# Altium PCB breakout_board.PcbDoc
Units mil, origin at the board's own origin, x right, y up, seen from the top; angles counter-clockwise.
Board outline 2420 x 1070 mil, 4 copper layers (Top Layer, Internal Plane 1, Internal Plane 2, Bottom Layer); 4 components, 24 nets, 54 pads, 0 vias.
Unrouted connection lines stored in the file: 2.
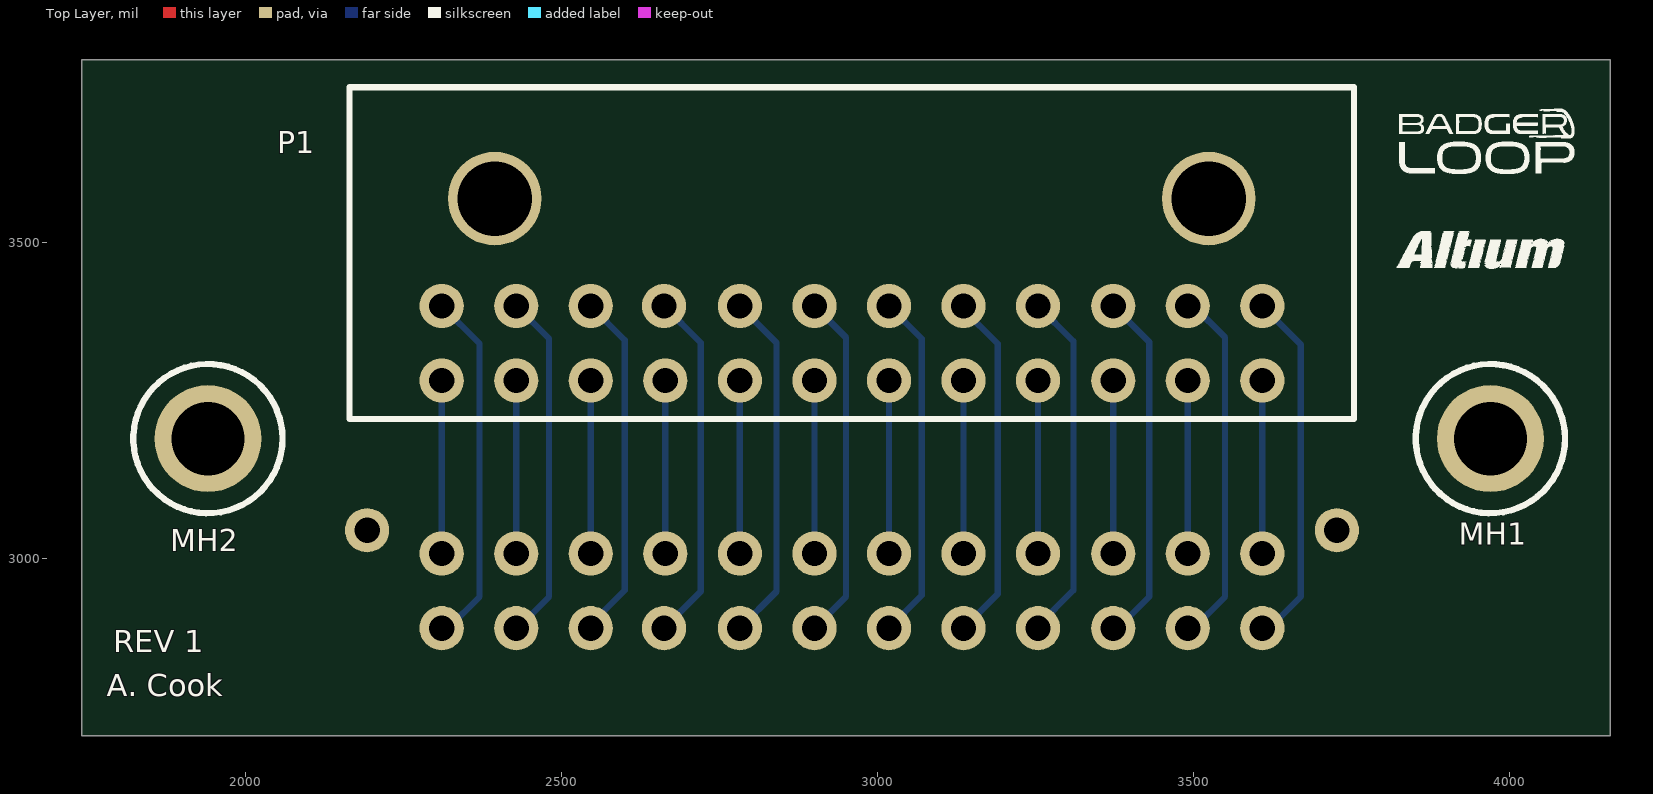
[diagram p0: Top Layer view]
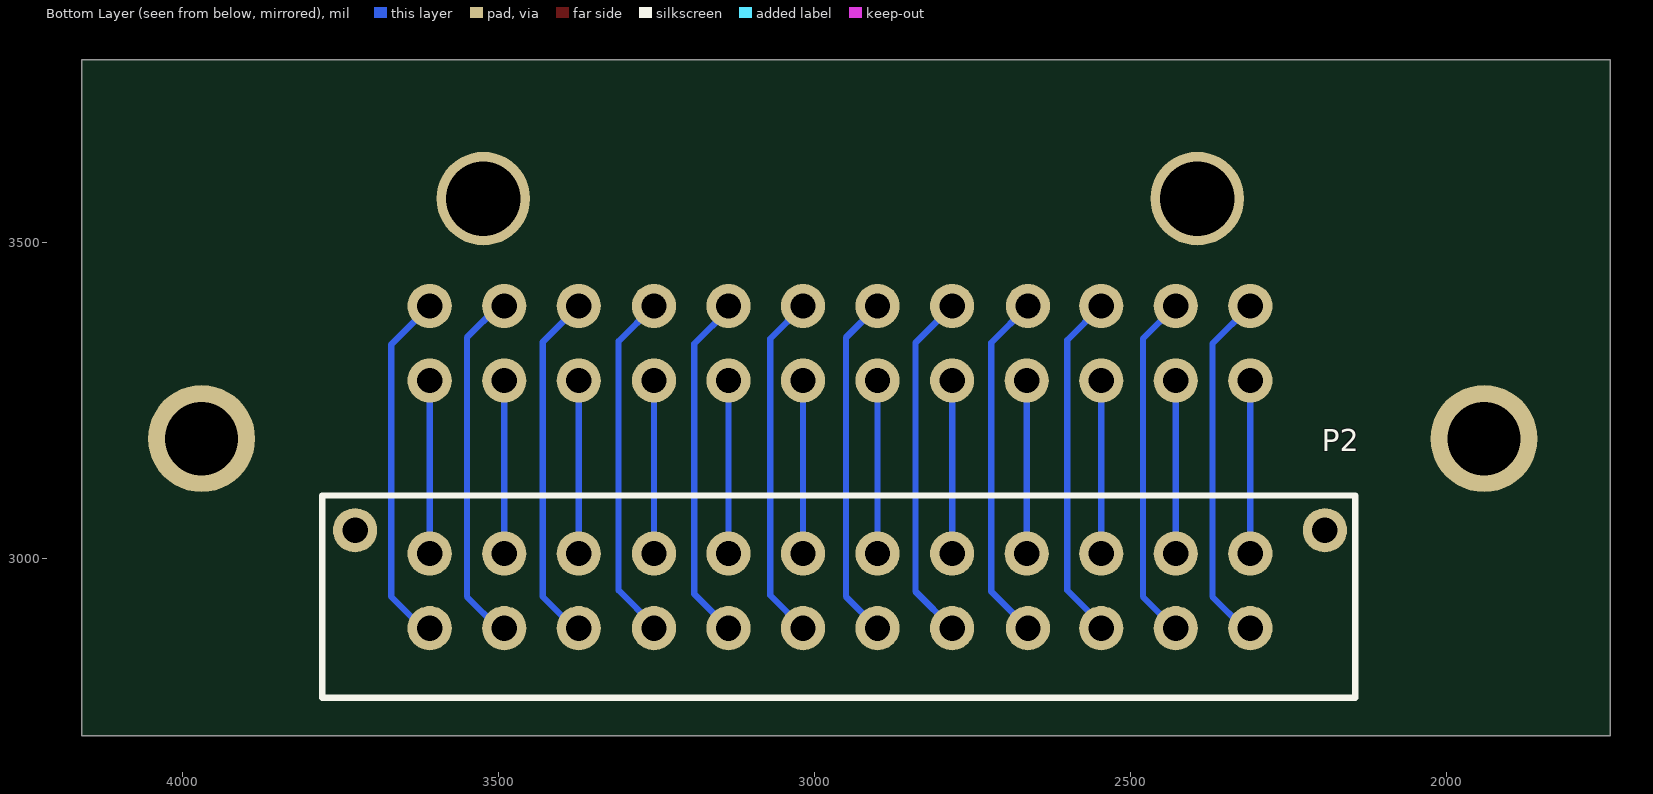
[diagram p1: Bottom Layer view, seen from below]
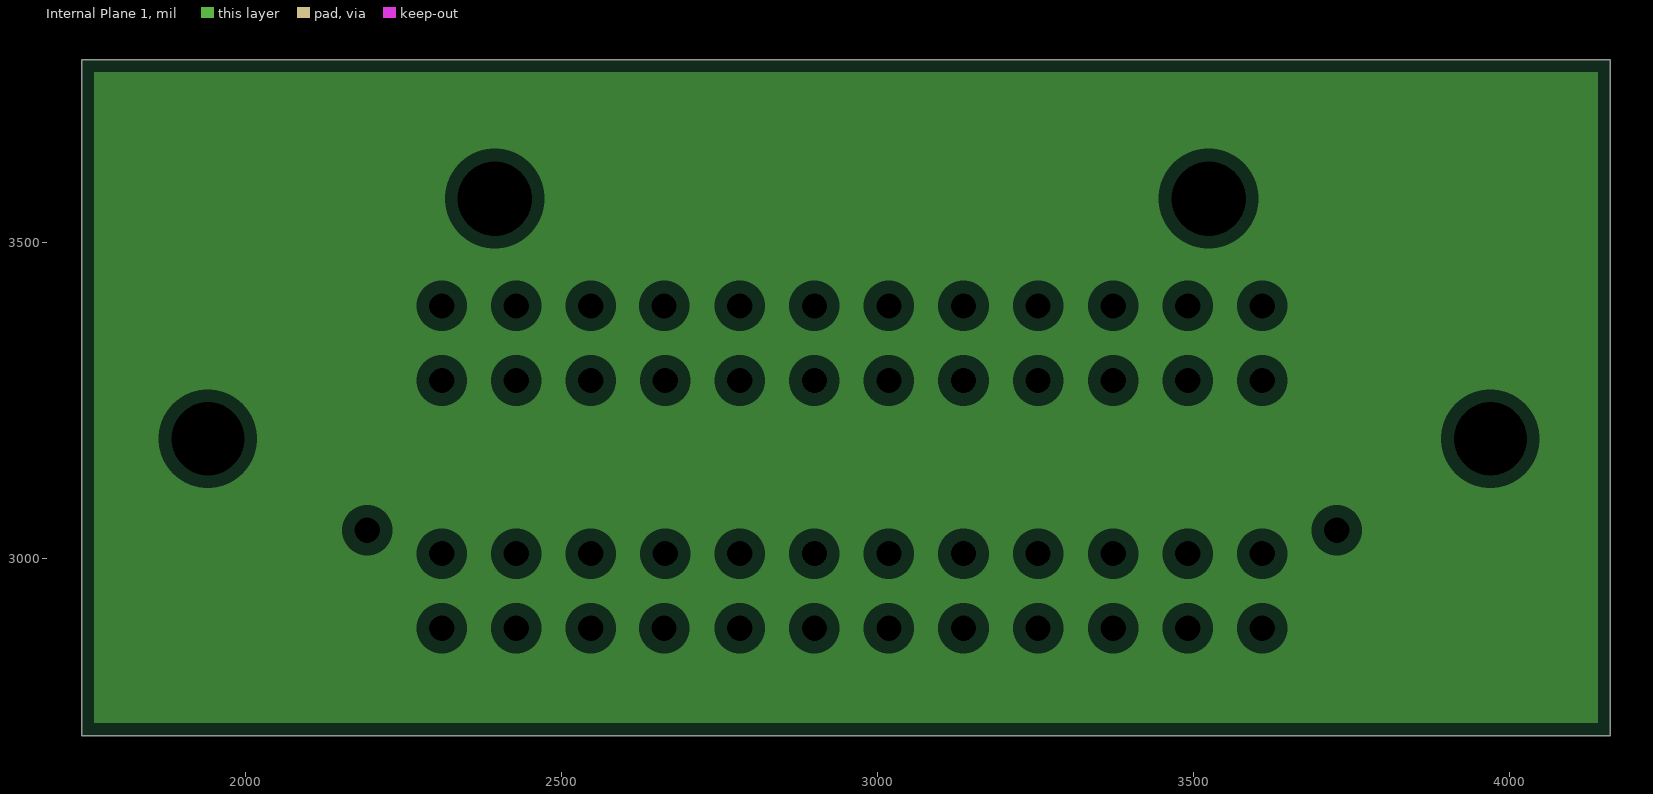
[diagram p2: Internal Plane 1, clearances drawn from the general rule]
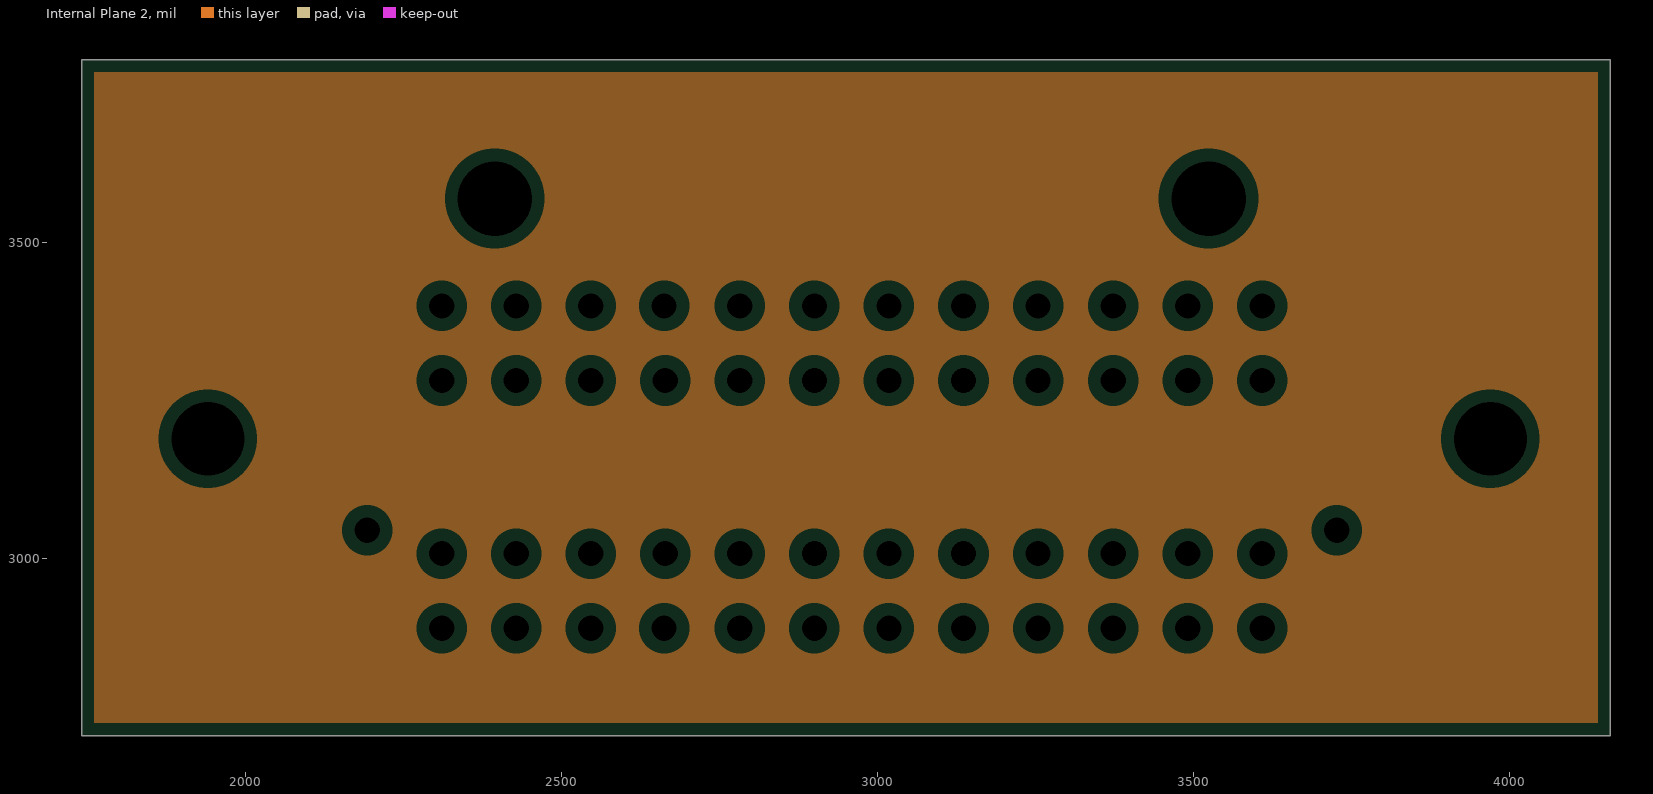
[diagram p3: Internal Plane 2, clearances drawn from the general rule]

## Layer stack, top to bottom
Top Solder: solder mask 0.4, Solder Resist, Dk 3.5
Top Layer: signal copper 1.4
Dielectric 1: dielectric 12.6, FR-4, Dk 4.8
Internal Plane 1: plane copper 1.4
Dielectric2: dielectric 12.6, FR-4, Dk 4.8
Internal Plane 2: plane copper 1.4
Dielectric3: dielectric 12.6, FR-4, Dk 4.8
Bottom Layer: signal copper 1.4
Bottom Solder: solder mask 0.4, Solder Resist, Dk 3.5

## Board outline
1740,2720 1740,3790 4160,3790 4160,2720

## Design rules (kind name [scope] priority, off if disabled: settings)
Clearance [All] p1: gap=10 ignorepadtopadclearanceinfootprint=FALSE except(0: Arc-Hole Track-Hole SMDPad-Hole THPad-Hole Via-Hole Fill-Hole Poly-Hole Region-Hole Text-Hole)
PlaneClearance [All] p1: clearance=20
PlaneConnect [All] p1: planeconnectstyle=Relief reliefexpansion=20 reliefentries=4 reliefconductorwidth=10 reliefairgap=10
PolygonConnect [All] p1: connectstyle=Relief reliefconductorwidth=10 reliefentries=4 polygonreliefangle="90 Angle" airgapwidth=10
RoutingVias [All] p1: holewidth=28 width=50 viastyle="Through Hole" minholewidth=28 minwidth=50 maxholewidth=28 maxwidth=50
SolderMaskExpansion [All] p1: expansion=4
Width [All] p1: maxlimit=10 minlimit=10 preferedwidth=10
28 further rules are at their usual default settings.

## Classes and differential pairs
component class connectors: MH1 MH2

## Components (designator, comment, footprint, x,y, rotation, side; value= is the part's Value field where it differs from the comment)
MH1 "4-40 Mount Hole" MH 3970,3190 r0 top
MH2 "4-40 Mount Hole" MH 1940,3190 r0 top
P1 "43045-2400" 430452400 2394,3570 r180 top
P2 "43045-2412" 0430452412 2394,2720 r180 bottom

## Footprints (in the part's own frame and the unit in brackets; to place one, negate y for a bottom-side part, rotate by r counter-clockwise, add the part's x,y. Pads: shape width x height; smd on the part's side, far side on the other; paste and mask are expansions set on the pad)
430452400 [mil]
  round 70 hole 40: 1(84,170) 2(-34,170) 3(-152,170) 4(-268,170) 5(-388,170) 6(-506,170) 7(-624,170) 8(-742,170) 9(-860,170) 10(-979,170) 11(-1097,170) 12(-1215,170) 13(84,288) 14(-34,288) 15(-152,288) 16(-270,288) 17(-388,288) 18(-506,288) 19(-624,288) 20(-742,288) 21(-860,288) 22(-979,288) 23(-1097,288) 24(-1215,288)
  round 148 hole 118: 21(-1130,0) 21(0,0)
  silkscreen extent -1360,-176 230,349, body extent -1350,-176 231,306, height 340
0430452412 [mil]
  round 70 hole 40: 1(84,170) 2(-34,170) 3(-152,170) 4(-268,170) 5(-388,170) 6(-506,170) 7(-624,170) 8(-742,170) 9(-860,170) 10(-979,170) 11(-1097,170) 12(-1215,170) 13(84,288) 14(-34,288) 15(-152,288) 16(-270,288) 17(-388,288) 18(-506,288) 19(-624,288) 20(-742,288) 21(-860,288) 22(-979,288) 23(-1097,288) 24(-1215,288) ""(-1333,325) ""(202,325)
  silkscreen extent -1385,60 250,380, body extent -1356,-1 225,418, height 405
MH [mm] "#10 Mount Hole"
  round 4.3 hole 2.946 unplated: 2(0,0)
  silkscreen extent -3,-3 3,3, body extent -2.32,-2.58 2.32,2.07, height 2.84

## Part data
P1: "Molex MICRO-FIT 3.0 Series, Series Number 43045, 3mm Pitch 24 Way 2 Row Right Angle PCB Header, Solder Termination, 5A", Color=Black, Contact Resistance=10mR, Current Rating=5A, Flammability Rating="UL94 V-0", Insulation Resistance=1GR, Manufacturer=Molex, Max Operating Temperature=105°C, Max Voltage Rating (DC)=250.25kV, Min Operating Temperature=-40°C, Operating Supply Voltage=250V, Package Quantity=576, Supplier Part Number 1=WM4728-ND, Voltage Rating=600V, Approvals=UL,CSA,TUV, ComponentLink1Description=https://datasheet.ciiva.com/19461/800104-19461233.pdf?src-supplier=Jameco, ComponentLink1URL=https://datasheet.ciiva.com/19461/800104-19461233.pdf?src-supplier=Jameco, ComponentLink2Description=https://datasheet.ciiva.com/36179/144580430452400-pcb-headers-36179650.pdf?src-supplier=Onlinecomponents.com, ComponentLink2URL=https://datasheet.ciiva.com/36179/144580430452400-pcb-headers-36179650.pdf?src-supplier=Onlinecomponents.com, ComponentLink3Description=https://datasheet.ciiva.com/5156/0430452400-pcb-headers-5156852.pdf?src-supplier=Mouser, ComponentLink3URL=https://datasheet.ciiva.com/5156/0430452400-pcb-headers-5156852.pdf?src-supplier=Mouser, ComponentLink4Description=https://datasheet.ciiva.com/11748/0900766b80d6135b-11748645.pdf?src-supplier=RSComponents, ComponentLink4URL=https://datasheet.ciiva.com/11748/0900766b80d6135b-11748645.pdf?src-supplier=RSComponents, ComponentLink5Description=https://datasheet.ciiva.com/7839/1596512-7839674.pdf?src-supplier=Element14, ComponentLink5URL=https://datasheet.ciiva.com/7839/1596512-7839674.pdf?src-supplier=Element14, ComponentLink6Description=https://datasheet.ciiva.com/16657/0430452400-pcb-headers-16657916.pdf?src-supplier=Avnet+Europe, ComponentLink6URL=https://datasheet.ciiva.com/16657/0430452400-pcb-headers-16657916.pdf?src-supplier=Avnet+Europe, ComponentLink7Description=https://datasheet.ciiva.com/14155/04402310-14155214.pdf?src-supplier=Distrelec, ComponentLink7URL=https://datasheet.ciiva.com/14155/04402310-14155214.pdf?src-supplier=Distrelec, Contact Material=Brass,Tin, Contact Plating=Tin, Depth=12.2mm, Gender=Male, Glow Wire Compliant=Compliant, Halogen Free="Low Halogen", Height=8.77mm, Housing Color=Black, Housing Material=Thermoplastic, Lead Free="Lead Free", Lead Pitch=3mm, Length=40.15mm, Manufacturer Part Number=43045-2400, Max Current Rating=5A, Mount="Through Hole", Number of Circuits=24, Number of Contacts=24, Number of Poles=24, Number of Positions=24, Number of Rows=2, Orientation="Right Angle", Packaging=Tray, Pitch=3mm, Pricing 1="1=6.20000, 10=5.95100, 100=4.95920, 576=4.21531, 1152=3.59542 (USD)", Radiation Hardening=No, REACH SVHC=Unknown, RoHS=Yes, Row Spacing=3mm, Stock 1=970, Supplier 1=Digi-Key, Termination=Solder, Voltage Rating (AC)=250V, Voltage Rating (DC)=250V, Working Voltage=250V
P2: "HEADER, VERTICAL, 24WAY; Series:Micro-Fit 3.0; Pitch Spacing:3mm; Contact Termination Type:Through Hole; No. of Contacts:24; No. of Rows:2; Connector Mounting:PCB; Gender:Plug; Contact Material:Brass; Contact Plating:Tin; ;RoHS Compliant: Yes", Color=Black, Contact Resistance=10mR, Current Rating=5A, Flammability Rating="UL94 V-0", Insulation Resistance=1GR, Manufacturer=Molex, Max Operating Temperature=105°C, Max Voltage Rating (DC)=250.25kV, Min Operating Temperature=-40°C, Operating Supply Voltage=250V, Package Quantity=576, Supplier Part Number 1=WM4716-ND, Voltage Rating=600V, Approvals=UL,CSA,TUV, ComponentLink1Description=http://www.farnell.com/datasheets/1786158.pdf?src-supplier=Element14, ComponentLink1URL=http://www.farnell.com/datasheets/1786158.pdf?src-supplier=Element14, ComponentLink2Description=https://www.alliedelec.com/m/d/28e7c516ce872cc01c31d58871c770af.pdf?src-supplier=Allied+Electronics, ComponentLink2URL=https://www.alliedelec.com/m/d/28e7c516ce872cc01c31d58871c770af.pdf?src-supplier=Allied+Electronics, ComponentLink3Description=http://www.jameco.com/Jameco/Products/ProdDS/883907.pdf?src-supplier=Jameco, ComponentLink3URL=http://www.jameco.com/Jameco/Products/ProdDS/883907.pdf?src-supplier=Jameco, ComponentLink4Description=http://www.mouser.com/ds/2/276/0430452412_PCB_HEADERS-168381.pdf?src-supplier=Mouser, ComponentLink4URL=http://www.mouser.com/ds/2/276/0430452412_PCB_HEADERS-168381.pdf?src-supplier=Mouser, ComponentLink5Description=http://www.molex.com/webdocs/datasheets/pdf/en-us/0430452412_PCB_HEADERS.pdf?src-supplier=Avnet, ComponentLink5URL=http://www.molex.com/webdocs/datasheets/pdf/en-us/0430452412_PCB_HEADERS.pdf?src-supplier=Avnet, ComponentLink6Description=http://uk.rs-online.com/webdocs/13c3/0900766b813c3b1e.pdf?src-supplier=RSComponents, ComponentLink6URL=http://uk.rs-online.com/webdocs/13c3/0900766b813c3b1e.pdf?src-supplier=RSComponents, ComponentLink7Description=http://www.molex.com/webdocs/datasheets/pdf/en-us/0430452412_PCB_HEADERS.pdf?src-supplier=Avnet+Europe, ComponentLink7URL=http://www.molex.com/webdocs/datasheets/pdf/en-us/0430452412_PCB_HEADERS.pdf?src-supplier=Avnet+Europe, Connector Type=Plug,Socket, Contact Material=Brass,Tin, Contact Plating=Tin, Depth=8.77mm, Gender=Male, Glow Wire Compliant=Compliant, Halogen Free="Low Halogen", Height=9.91mm, Housing Color=Black, Housing Material=Thermoplastic, Lead Free="Lead Free", Lead Pitch=3mm, Length=40.15mm, Material=Polyester, Max Current Rating=5A, Mount="Through Hole", Number of Circuits=24, Number of Contacts=24, Number of Poles=24, Number of Positions=24, Number of Rows=2, Orientation=Vertical, Packaging=Tray, Pitch=3mm, Pricing 1="1=4.89, 10=4.693, 100=3.9112, 576=3.32451, 1152=2.83562 (USD)", Radiation Hardening=No, REACH SVHC=Unknown, Row Spacing=3mm, Stock 1=772, Supplier 1=Digi-Key, Termination=Solder, Voltage Rating (AC)=250V, Voltage Rating (DC)=250V, Working Voltage=250V

## Nets (pads, with @x,y where several pads share a name; then routed paths per layer and width w, separated by ;. In a path a pad name is that pad's centre, name@x,y a point inside that pad or via, vN(x,y) a via of type N, cw(c..) or ccw(c..) an arc to the next point about the centre after c; other vN are vias at no path point)
NetP1_1: P1.1 P2.1 | length 565.6
  Bottom Layer w10: P2.1 2320,2890 2370,2940 2370,3340 P1.1
NetP1_2: P1.2 P2.2 | length 562.7
  Bottom Layer w10: P1.2@2430,3402 P1.2 2480,3348 2480,2940 2430,2890 P2.2 P2.2@2432,2886
NetP1_3: P1.3 P2.3 | length 554.7
  Bottom Layer w10: P2.3 2546,2896 2600,2950 2600,3346 P1.3
NetP1_4: P1.4 P2.4 | length 558
  Bottom Layer w10: P2.4 2720,2948 2720,3342 P1.4
NetP1_5: P1.5 P2.5 | length 572.2
  Bottom Layer w10: P1.5 2840,3342 2840,2948 P2.5 P2.5@2792,2880
NetP1_6: P1.6 P2.6 | length 551.4
  Bottom Layer w10: P2.6 2950,2940 2950,3350 P1.6
NetP1_7: P1.7 P2.7 | length 553.1
  Bottom Layer w10: P2.7 3070,2942 3070,3348 P1.7
NetP1_8: P1.8 P2.8 | length 554.7
  Bottom Layer w10: P2.8 3190,2944 3190,3340 3136,3394 P1.8
NetP1_9: P1.9 P2.9 | length 556.4
  Bottom Layer w10: P2.9 3254,2894 3310,2950 3310,3344 P1.9
NetP1_10: P1.10 P2.10 | length 571
  Bottom Layer w10: P1.10 3430,3343 3430,2940 3380,2890 P2.10 P2.10@3379.86,2896.86
NetP1_11: P1.11 P2.11 | length 569.4
  Bottom Layer w10: P2.11 3500,2890 3550,2940 3550,3350 3500,3400 P1.11
NetP1_12: P1.12 P2.12 | length 567
  Bottom Layer w10: P2.12 3620,2890 3670,2940 3670,3339 P1.12
NetP1_13: P1.13 P2.13 | length 276.8
  Bottom Layer w10: P1.13@2309,3307.11 P1.13@2310,3308.11 ; P2.13 P1.13 ; P1.13@2311,3307.11 P1.13@2312,3308.11
NetP1_14: P1.14 P2.14 | length 276.8
  Bottom Layer w10: P1.14@2427,3307.11 P1.14@2428,3308.11 ; P2.14 P1.14 ; P1.14@2429,3307.11 P1.14@2430,3308.11
NetP1_15: P1.15 P2.15 | length 276.8
  Bottom Layer w10: P1.15@2544,3306.11 P1.15@2546,3308.11 ; P2.15 P1.15
NetP1_16: P1.16 P2.16 | length 276.8
  Bottom Layer w10: P1.16@2663,3307.11 P1.16@2664,3308.11 ; P2.16 P1.16 ; P1.16@2665,3307.11 P1.16@2666,3308.11
NetP1_17: P1.17 P2.17 | length 276.8
  Bottom Layer w10: P1.17@2781,3307.11 P1.17@2782,3308.11 ; P2.17 P1.17 ; P1.17@2783,3307.11 P1.17@2784,3308.11
NetP1_18: P1.18 P2.18 | length 276.8
  Bottom Layer w10: P1.18@2899,3307.11 P1.18@2900,3308.11 ; P2.18 P1.18 ; P1.18@2901,3307.11 P1.18@2902,3308.11
NetP1_19: P1.19 P2.19 | length 276.8
  Bottom Layer w10: P1.19@3017,3307.11 P1.19@3018,3308.11 ; P2.19 P1.19 ; P1.19@3019,3307.11 P1.19@3020,3308.11
NetP1_20: P1.20 P2.20 | length 276.8
  Bottom Layer w10: P1.20@3135,3307.11 P1.20@3136,3308.11 ; P2.20 P1.20 ; P1.20@3137,3307.11 P1.20@3138,3308.11
NetP1_21: P1.21 P2.21 | length 290.8
  Bottom Layer w10: P1.21@3244.14,3308.11 P1.21@3254,3298.25 ; P1.21@3253,3307.11 P1.21@3254,3308.11 ; P2.21 P1.21@3254,3282 ; P1.21@3255,3307.11 P1.21@3256,3308.11
NetP1_22: P1.22 P2.22 | length 276.8
  Bottom Layer w10: P1.22@3372,3307.11 P1.22@3373,3308.11 ; P2.22 P1.22 ; P1.22@3374,3307.11 P1.22@3375,3308.11
NetP1_23: P1.23 P2.23 | length 276.8
  Bottom Layer w10: P1.23@3490,3307.11 P1.23@3491,3308.11 ; P2.23 P1.23 ; P1.23@3492,3307.11 P1.23@3493,3308.11
NetP1_24: P1.24 P2.24 | length 276.8
  Bottom Layer w10: P1.24@3608,3307.11 P1.24@3609,3308.11 ; P2.24 P1.24 ; P1.24@3610,3307.11 P1.24@3611,3308.11
pads on no net: MH1.2 MH2.2 P2.

## Polygon pours and split planes (outlines as drawn)
no net on Bottom Layer "Bottom Layer-No Net" (solid, pour order 10): 6910,1295
no net on Bottom Layer "Bottom Layer-No Net 2" (solid, pour order 8): 4135,1015
no net on Bottom Layer "Bottom Layer-No Net 1" (solid, pour order 6): 4220,1085
no net on Internal Plane 1 (split plane): 4139.9,2740.1 1760.1,2740.1 1760.1,3769.9 4139.9,3769.9
no net on Internal Plane 2 (split plane): 4139.9,2740.1 1760.1,2740.1 1760.1,3769.9 4139.9,3769.9

## Other copper
Top Layer:
  text ".layer_name" at 1440,1220 h60
Bottom Layer:
  text ".layer_name" at 1450,1360 h60
Internal Plane 1 (plane layer: these items are gaps in the copper):
  text ".layer_name" at 1460,1450 h60
Internal Plane 2 (plane layer: these items are gaps in the copper):
  text ".layer_name" at 1450,1290 h60

## Silkscreen, mask and mechanical layers (free items; w line width, h text height)
Top Overlay:
  drawing of 16 lines, arcs and shapes, not listed
  text "REV 1" at 1790,2840 h60
  text "A. Cook" at 1780,2770 h60
Board Outline:
  the board outline again, w10
Mechanical 16:
  drawing of 339 lines, arcs and shapes, not listed
  text "1" at 1543.84,8172.5 h70
  text "2" at 4039.5,8172.5 h70
  text "4" at 9035.51,8172.5 h70
  text "A" at 387.5,7575 h70
  text "A" at 11030,7575 h70
  text "B" at 11027.5,5702 h70
  text "B" at 387.5,5649.5 h70
  text "Layer" at 4510.38,3780 h60
  text "Name" at 4920.29,3780 h60
  text "Material" at 5960,3780 h60
  text "Thickness" at 6819.77,3780 h60
  text "Constant" at 7469.6,3780 h60
  text "Board Layer Stack" at 8039.46,3780 h60
  text "1" at 4510.38,3660 h60
  text "Top Overlay" at 4920.29,3660 h60
  text "2" at 4510.38,3540 h60
  text "Top Solder" at 4920.29,3540 h60
  text "Solder Resist" at 5960,3540 h60
  text "0.40mil" at 6819.77,3540 h60
  text "3.5" at 7469.6,3540 h60
  text "3" at 4510.38,3420 h60
  text "Top Layer" at 4920.29,3420 h60
  text "Copper" at 5960,3420 h60
  text "1.40mil" at 6819.77,3420 h60
  text "C" at 11027.5,3327 h70
  text "4" at 4510.38,3300 h60
  text "Dielectric 1" at 4920.29,3300 h60
  text "FR-4" at 5960,3300 h60
  text "12.60mil" at 6819.77,3300 h60
  text "4.8" at 7469.6,3300 h60
  text "C" at 387.5,3274.5 h70
  text "5" at 4510.38,3180 h60
  text "Internal Plane 1" at 4920.29,3180 h60
  text "Copper" at 5960,3180 h60
  text "1.40mil" at 6819.77,3180 h60
  text "6" at 4510.38,3060 h60
  text "Dielectric2" at 4920.29,3060 h60
  text "FR-4" at 5960,3060 h60
  text "12.60mil" at 6819.77,3060 h60
  text "4.8" at 7469.6,3060 h60
  text "7" at 4510.38,2940 h60
  text "Internal Plane 2" at 4920.29,2940 h60
  text "Copper" at 5960,2940 h60
  text "1.40mil" at 6819.77,2940 h60
  text "8" at 4510.38,2820 h60
  text "Dielectric3" at 4920.29,2820 h60
  text "FR-4" at 5960,2820 h60
  text "12.60mil" at 6819.77,2820 h60
  text "4.8" at 7469.6,2820 h60
  text "9" at 4510.38,2700 h60
  text "Bottom Layer" at 4920.29,2700 h60
  text "Copper" at 5960,2700 h60
  text "1.40mil" at 6819.77,2700 h60
  text "10" at 4510.38,2580 h60
  text "Bottom Solder" at 4920.29,2580 h60
  text "Solder Resist" at 5960,2580 h60
  text "0.40mil" at 6819.77,2580 h60
  text "3.5" at 7469.6,2580 h60
  text "11" at 4510.38,2460 h60
  text "Bottom Overlay" at 4920.29,2460 h60
  text "ENGINEER:" at 6502.5,1112.5 h45
  text "TITLE:" at 8002.5,1112.5 h45
  text "D" at 11027.5,957 h70
  text "Andrew Cook" at 6780,915 h110
  text "D" at 387.5,904.5 h70
  text ".PCB_FILE_NAME_NO_PATH" at 8097.5,864.78 h200
  text "PCB DESIGNER:" at 6502.5,817.5 h45
  text "Andrew Cook" at 6537.5,687.5 h110
  text "DATE:" at 6502.5,512.5 h45
  text "PART NO.:" at 8002.5,512.5 h45
  text "REV:" at 10102.5,512.5 h45
  text "Badgerloop" at 5202.5,412.5 h110
  text ".PRINT_DATE" at 6552.5,392.5 h110
  text "Battery Module Breakout Board" at 8072.5,387.5 h110
  text "A" at 10112.5,387.5 h110
  text "ERB Room 133" at 5202.5,312.5 h110
  text "1400 Engineering Drive" at 5202.5,212.5 h110
  text "FILE NAME:" at 6502.5,212.5 h45
  text "DWG NO:" at 8002.5,212.5 h45
  text "SCALE:" at 10102.5,212.5 h45
  text "Madison, WI 53706" at 5202.5,112.5 h110
  text ".PCB_FILE_NAME_NO_PATH" at 6552.5,92.5 h110
  text "1:1" at 10117.5,87.5 h110
  text "3" at 6528.84,-127.5 h70
  text "4" at 9035.51,-127.5 h70
Drill Drawing:
  circle w10: c1838.04,4293.33 r33.33
  lines w10: 1804.71,4476.67 1871.38,4476.67 1838.04,4410 1804.71,4476.67 ; 1804.71,4560 1871.38,4560 1871.38,4626.67 1804.71,4626.67 1804.71,4560
  lines w15: 1744.92,4215 8745.03,4215 ; 1744.92,4665 8745.03,4665 ; 2295.79,4065 2295.79,4815 ; 2835.66,4065 2835.66,4815 ; 3975.32,4065 3975.32,4815 ; 4481.2,4065 4481.2,4815 ; 5215,4065 5215,4815 ; 6714.55,4065 6714.55,4815 ; 7304.4,4065 7304.4,4815 ; 8050.2,4065 8050.2,4815 ; 1744.92,4065 8745.03,4065 8745.03,4815 1744.92,4815 1744.92,4065
  text "Symbol" at 1834.92,4710 h72
  text "Count" at 2340.79,4710 h72
  text "Hole Size" at 2880.66,4710 h72
  text "Plated" at 4020.32,4710 h72
  text "Hole Type" at 4526.2,4710 h72
  text "Drill Layer Pair" at 5260,4710 h72
  text "Via/Pad" at 6759.55,4710 h72
  text "Pad Shape" at 7349.4,4710 h72
  text "Template" at 8095.2,4710 h72
  text "50" at 2340.79,4560 h60
  text "40.00mil (1.016mm)" at 2880.66,4560 h60
  text "PTH" at 4020.32,4560 h60
  text "Round" at 4526.2,4560 h60
  text "Top Layer - Bottom Layer" at 5260,4560 h60
  text "Pad" at 6759.55,4560 h60
  text "Rounded" at 7349.4,4560 h60
  text "c178h102" at 8095.2,4560 h60
  text "2" at 2340.79,4410 h60
  text "116.00mil (2.946mm)" at 2880.66,4410 h60
  text "NPTH" at 4020.32,4410 h60
  text "Round" at 4526.2,4410 h60
  text "Top Layer - Bottom Layer" at 5260,4410 h60
  text "Pad" at 6759.55,4410 h60
  text "Rounded" at 7349.4,4410 h60
  text "c430hn295" at 8095.2,4410 h60
  text "2" at 2340.79,4260 h60
  text "118.00mil (2.997mm)" at 2880.66,4260 h60
  text "PTH" at 4020.32,4260 h60
  text "Round" at 4526.2,4260 h60
  text "Top Layer - Bottom Layer" at 5260,4260 h60
  text "Pad" at 6759.55,4260 h60
  text "Rounded" at 7349.4,4260 h60
  text "c376h300" at 8095.2,4260 h60
  text "54 Total" at 2340.79,4110 h60